# EAGLE board MRF24J40MA_Breakout_verB (EAGLE 6.4)
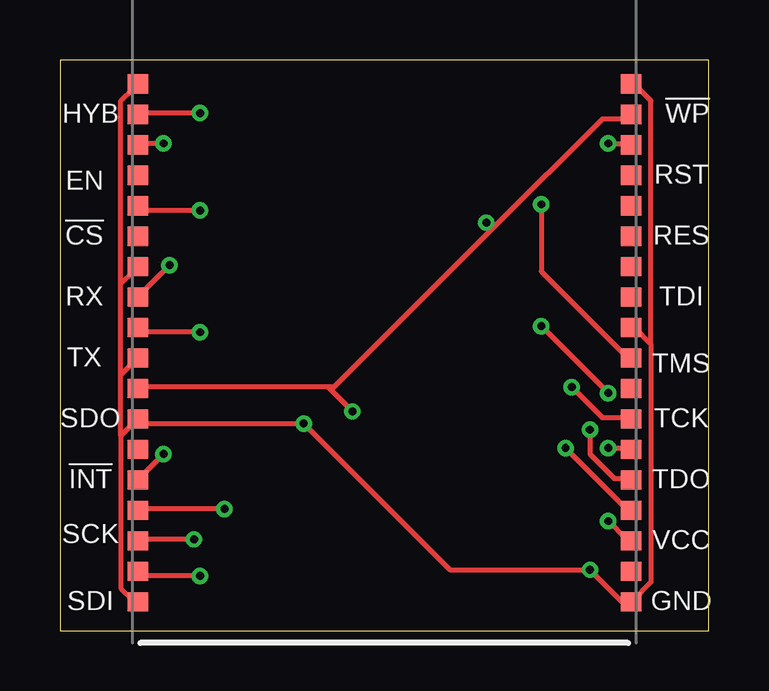
[diagram p0: board, top side]
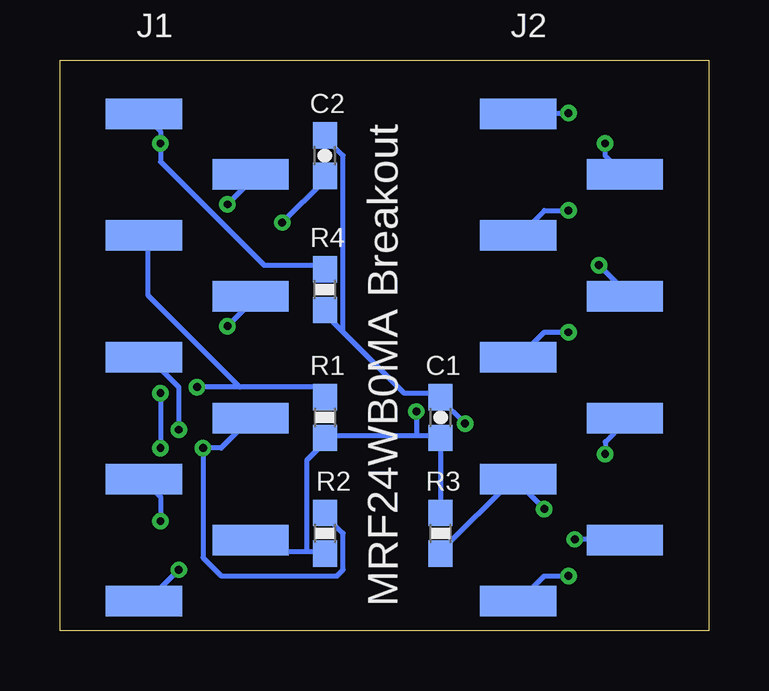
[diagram p1: board, bottom side, seen from below]

Size 27.05 x 23.8 mm. Coordinates in mm from the lower left corner, seen from the top.
Outline: 0,0 27.05,0 27.05,23.8 0,23.8 0,0
Copper layers (1*16): Top 0.0356mm / dielectric 1.5011mm / Bottom 0.0356mm
Design rules "LaenPCBOrder *": minimum track width 8mil, minimum drill 13mil, track to track 6mil, track to pad 6mil, pad to pad 6mil, via to via 6mil, smd to smd 6mil, copper to edge 15mil, drill to drill 6mil, minimum pad ring 7mil, minimum via ring 7mil, stop-mask expansion 4mil, vias tented up to drill 13mil, thermal gap 10mil

## Footprints (pad centres in the part's own frame; a part is rotated, then mirrored left to right if it is on the bottom)
0603-CAP = smd 1.1 x 1: 1 -0.85,0; 2 0.85,0
09-SMD = smd 3.175 x 1.27: 1 -2.223,10.16; 2 2.223,7.62; 3 -2.223,5.08; 4 2.223,2.54; 5 -2.223,0; 6 2.223,-2.54; 7 -2.223,-5.08; 8 2.223,-7.62; 9 -2.223,-10.16
0603-RES = smd 1.1 x 1: 1 -0.85,0; 2 0.85,0
MRF24WB0MA = smd 0.85 x 0.8: 1 -10.29,12.76; 2 -10.29,11.49; 3 -10.29,10.22; 4 -10.29,8.95; 5 -10.29,7.68; 6 -10.29,6.41; 7 -10.29,5.14; 8 -10.29,3.87; 9 -10.29,2.6; 10 -10.29,1.33; 11 -10.29,0.06; 12 -10.29,-1.21; 13 -10.29,-2.48; 14 -10.29,-3.75; 15 -10.29,-5.02; 16 -10.29,-6.29; 17 -10.29,-7.56; 18 -10.29,-8.83; 19 10.27,-8.83; 20 10.27,-7.56; 21 10.27,-6.29; 22 10.27,-5.02; 23 10.27,-3.75; 24 10.27,-2.48; 25 10.27,-1.21; 26 10.27,0.06; 27 10.27,1.33; 28 10.27,2.6; 29 10.27,3.87; 30 10.27,5.14; 31 10.27,6.41; 32 10.27,7.68; 33 10.27,8.95; 34 10.27,10.22; 35 10.27,11.49; 36 10.27,12.76

## Placement (x,y rotation side)
C1  1uF  [0603-CAP]  11.18,8.89 90 bottom
C2  1uF  [0603-CAP]  16,19.81 90 bottom
J1  CON-09  [09-SMD]  21.32,11.4 0 bottom
J2  CON-09  [09-SMD]  5.72,11.4 0 bottom
R1  4.7K  [0603-RES]  16,8.89 270 bottom
R2  4.7K  [0603-RES]  16,4.06 270 bottom
R3  4.7K  [0603-RES]  11.18,4.06 90 bottom
R4  4.7K  [0603-RES]  16,14.22 90 bottom
U$1  MRF24WB0MA  [MRF24WB0MA]  13.52,13.97 180 top

## Library data of the parts
C1 C2 R1-R4 = SparkFun-Passives
J1 J2 = Connectors
U$1 = mrf24wb0ma

## Nets
!CS: J2.3 U$1.23
!INT: J2.7 R3.1 U$1.33
!WP: J1.1 R4.2 U$1.16
EN: J2.2 U$1.21
GND: C1.2 C2.2 J1.9 R4.1 U$1.1 U$1.10 U$1.18 U$1.19 U$1.25 U$1.28 U$1.30 U$1.36
HYBERNATE: J2.1 U$1.20
RESET: J1.3 R1.1 U$1.7
RST: J1.2 U$1.9
RX: J2.4 U$1.26
SCK: J2.8 U$1.34
SDI: J2.9 U$1.35
SDO: J2.6 U$1.32
TCK: J1.6 R2.1 U$1.4
TDI: J1.4 U$1.6
TDO: J1.7 U$1.3
TMS: J1.5 U$1.5
TX: J2.5 U$1.27
VCC: C1.1 C2.1 J1.8 R1.2 R2.2 R3.2 U$1.17 U$1.29

## Tracks (layer width: path | path; a pad name or v marks a point on that pad's centre or on a via)
!CS  (via drill 0.33)
  Top 0.203: v5.84,17.53 3.3,17.53 U$1.23
  Bottom 0.203: v5.84,17.53 6.86,17.53 7.87,16.51 J2.3
!INT  (via drill 0.33)
  Top 0.203: v6.86,5.08 3.3,5.08 U$1.33
  Bottom 0.203: v6.86,5.08 7.87,6.1 J2.7 8.13,6.35 11.18,3.3 R3.1
!WP  (via drill 0.33)
  Top 0.203: v22.86,20.32 23.62,20.32 U$1.16
  Bottom 0.203: J1.1 23.37,21.34 22.86,20.83 v22.86,20.32 22.86,19.56 18.54,15.24 16,15.24 R4.2
EN  (via drill 0.33)
  Top 0.203: v4.32,20.32 3.3,20.32 U$1.21
  Bottom 0.203: v4.32,20.32 4.32,19.81 3.56,19.05 J2.2
GND  (via drill 0.33)
  Top 0.203: 24.64,11.94 24.64,2.03 23.88,1.27 U$1.1 23.62,1.02 v22.1,2.54 16.26,2.54 v10.16,8.64 3.3,8.64 U$1.30 3.05,8.64 2.54,8.13 | 24.64,11.94 23.88,12.7 U$1.10 | 24.64,11.94 24.64,22.1 24.13,22.61 23.88,22.61 U$1.18 | 2.54,8.13 2.54,1.78 3.05,1.27 U$1.36 | 2.54,10.67 3.05,11.18 U$1.28 | 2.54,8.13 2.54,10.67 | 2.54,14.48 3.05,14.99 U$1.25 | 2.54,10.67 2.54,14.48 | 2.54,14.48 2.54,22.1 3.05,22.61 U$1.19
  Bottom 0.203: v22.1,2.54 23.37,1.27 J1.9 | 15.24,12.45 16,13.21 R4.1 | 15.24,12.45 12.7,9.91 11.18,9.91 C1.2 11.18,9.65 v10.16,8.64 | 15.24,12.45 15.24,19.81 16,20.57 C2.2
HYBERNATE  (via drill 0.33)
  Top 0.203: v5.84,21.59 3.3,21.59 U$1.20
  Bottom 0.203: v5.84,21.59 7.87,21.59 J2.1
RESET  (via drill 0.33)
  Top 0.203: v21.34,10.16 22.61,8.89 23.62,8.89 U$1.7
  Bottom 0.203: 19.56,10.16 16.26,10.16 16,9.91 R1.1 | 19.56,10.16 v21.34,10.16 | 19.56,10.16 23.37,13.97 23.37,16.26 J1.3
RST  (via drill 0.33)
  Top 0.203: v20.07,17.78 20.07,14.99 23.62,11.43 U$1.9
  Bottom 0.203: v20.07,17.78 19.05,18.8 J1.2
RX  (via drill 0.33)
  Top 0.203: v4.57,15.24 3.3,13.97 U$1.26
  Bottom 0.203: v4.57,15.24 3.3,13.97 J2.4
SCK  (via drill 0.33)
  Top 0.203: v5.59,3.81 3.3,3.81 U$1.34
  Bottom 0.203: v5.59,3.81 3.56,3.81 J2.8
SDI  (via drill 0.33)
  Top 0.203: v5.84,2.29 3.3,2.29 U$1.35
  Bottom 0.203: v5.84,2.29 6.86,2.29 7.87,1.27 J2.9
SDO  (via drill 0.33)
  Top 0.203: v4.32,7.37 3.3,6.35 U$1.32
  Bottom 0.203: v4.32,7.37 4.32,7.87 3.56,8.64 J2.6
TCK  (via drill 0.33)
  Top 0.203: v21.08,7.62 23.62,5.08 U$1.4
  Bottom 0.203: J1.6 19.3,8.64 20.32,7.62 v21.08,7.62 21.08,3.05 20.32,2.29 15.49,2.29 15.24,2.54 15.24,4.06 16,4.83 R2.1
TDI  (via drill 0.33)
  Top 0.203: v22.86,7.62 23.62,7.62 U$1.6 | v20.07,12.7 v22.86,9.91
  Bottom 0.203: v22.86,9.91 v22.86,7.62 | v20.07,12.7 19.05,13.72 J1.4
TDO  (via drill 0.33)
  Top 0.203: v22.86,4.57 23.62,3.81 U$1.3
  Bottom 0.203: v22.86,4.57 22.86,5.59 23.37,6.1 J1.7
TMS  (via drill 0.33)
  Top 0.203: v22.1,8.38 22.1,7.37 23.11,6.35 23.62,6.35 U$1.5
  Bottom 0.203: v22.1,8.38 22.1,10.16 23.37,11.43 J1.5
TX  (via drill 0.33)
  Top 0.203: v5.84,12.45 3.3,12.45 U$1.27
  Bottom 0.203: v5.84,12.45 6.86,12.45 7.87,11.43 J2.5
VCC  (via drill 0.33)
  Top 0.203: 11.18,10.16 11.43,10.16 18.03,16.76 | 11.18,10.16 3.3,10.16 U$1.29 | 18.03,16.76 22.61,21.34 23.62,21.34 U$1.17 | 18.03,16.76 v17.78,17.02 | 11.18,10.16 v12.19,9.14
  Bottom 0.203: 16.76,3.3 18.8,3.3 19.05,3.56 J1.8 | 16.76,3.3 16,3.3 R2.2 | R3.2 C1.1 11.18,8.13 12.19,8.13 | 12.19,8.13 16,8.13 R1.2 16,7.87 16.76,7.11 16.76,3.3 | v17.78,17.02 16,18.8 C2.1 | v12.19,9.14 12.19,8.13

## Text on the board
tPlace: HYB | !WP | EN | RST | !CS | RES | RX | TDI | TX | TMS | SDO | TCK | !INT | TDO | SCK | VCC | SDI | GND
bPlace: MRF24WB0MA Breakout